# EAGLE board power-shield (EAGLE 7.5.0)
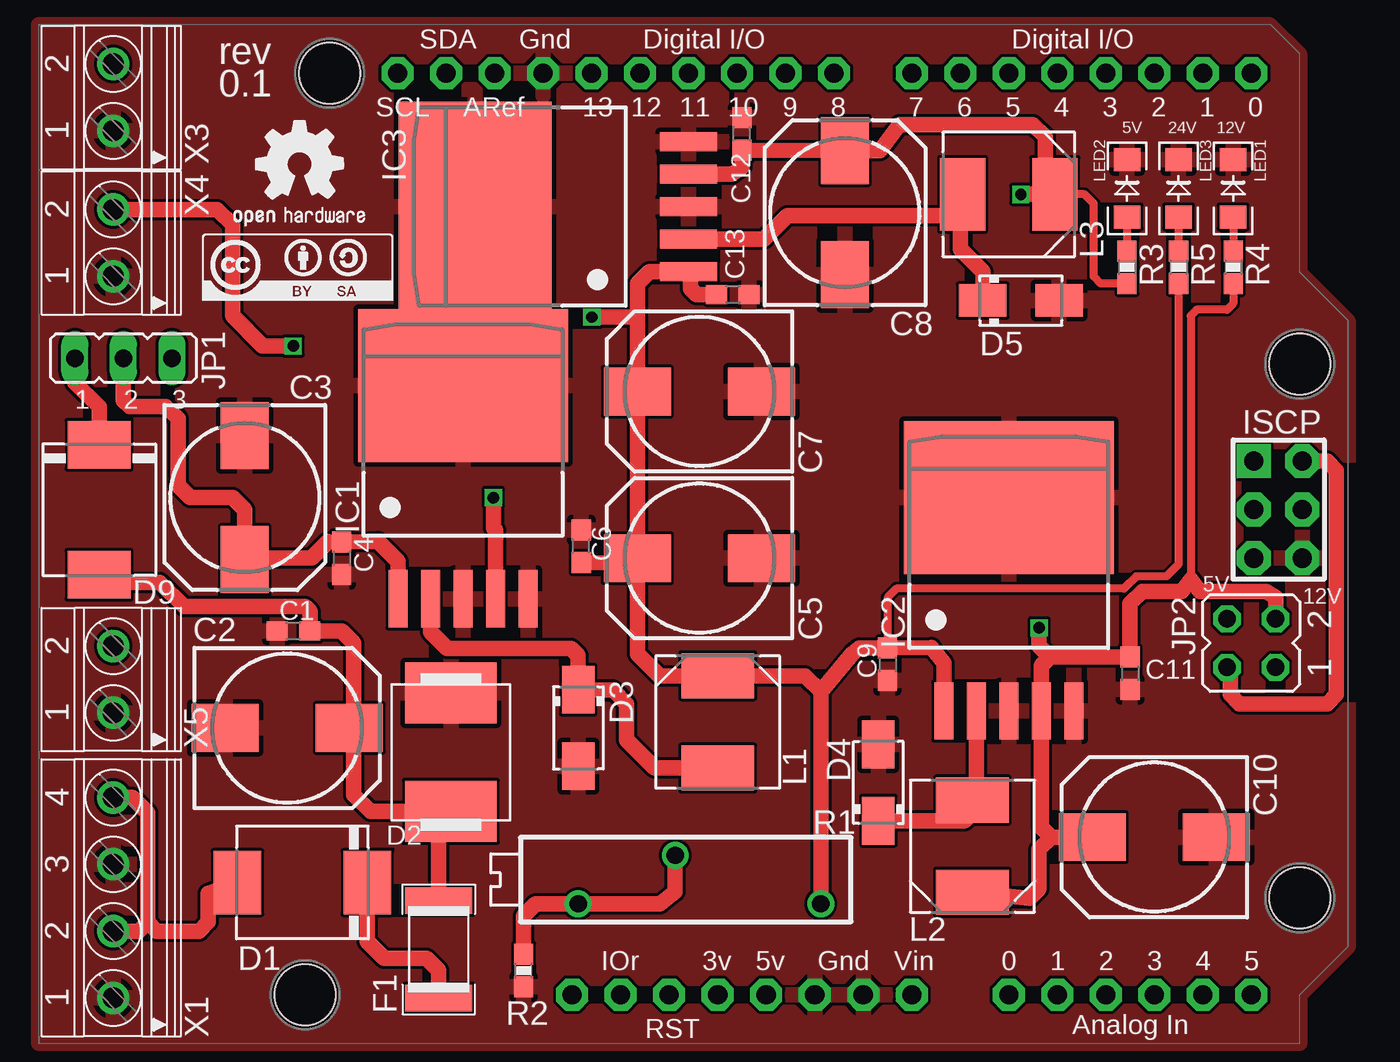
[diagram p0: board, top side]
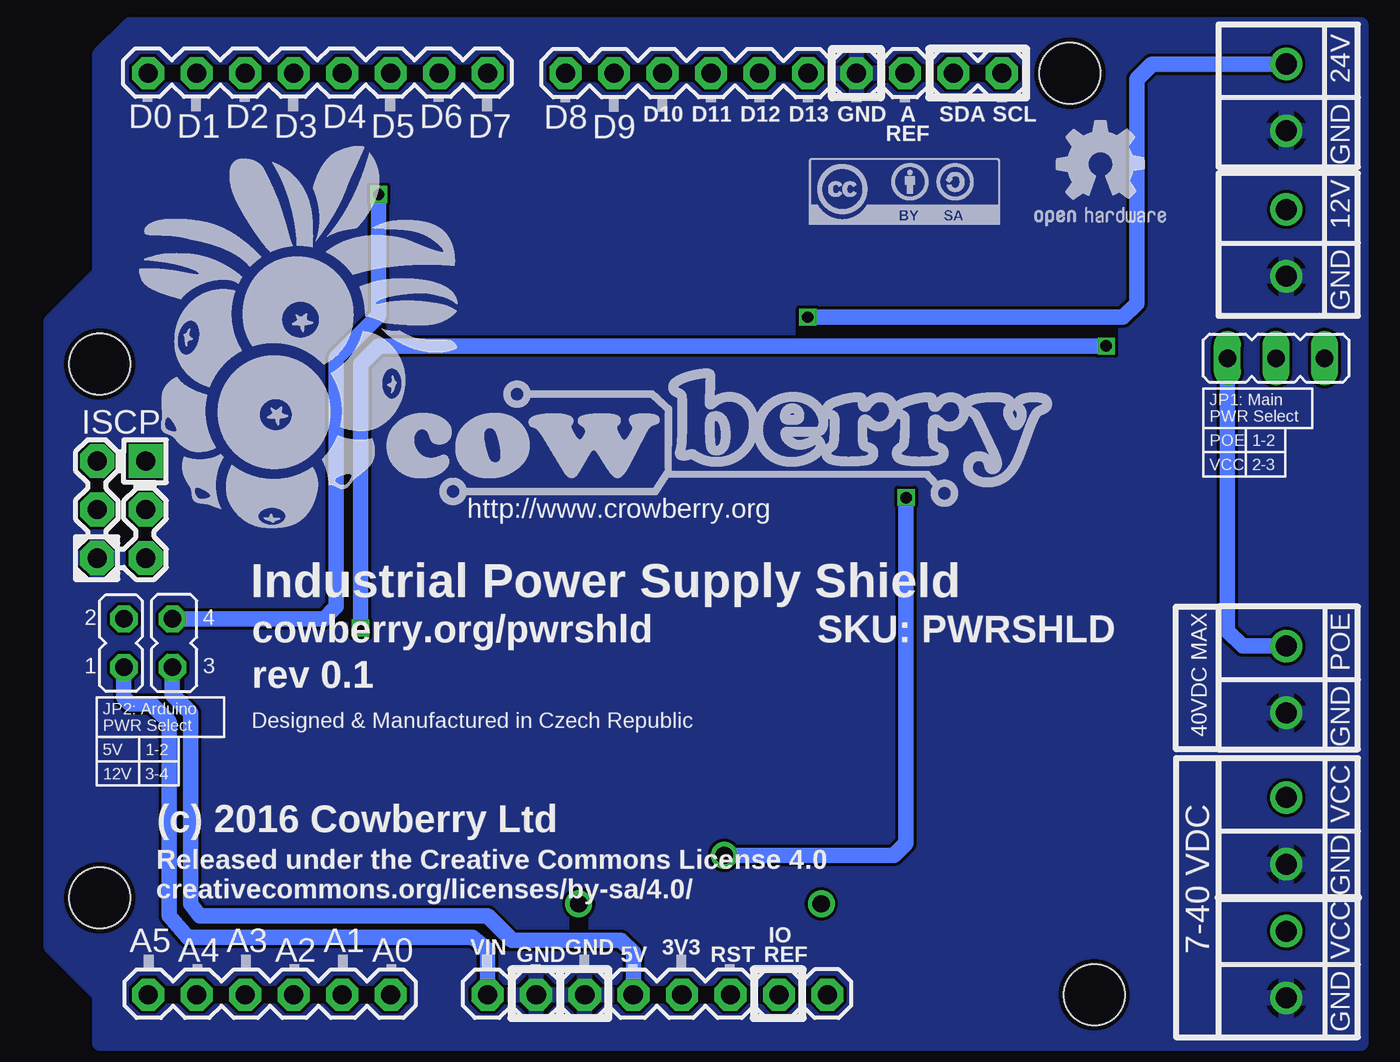
[diagram p1: board, bottom side, seen from below]

No outline drawn. Coordinates in mm, seen from the top.
Copper layers (1*16): Top 0.035mm / dielectric 1.5mm / Bottom 0.035mm
Design rules "Fusion_eagle_rule_v1.1": minimum track width 6mil, minimum drill 12mil, track to track 6mil, track to pad 6mil, pad to pad 6mil, via to via 6mil, smd to smd 0mil, copper to edge 10mil, drill to drill 10mil, minimum pad ring 10mil, minimum via ring 6mil, stop-mask expansion 2mil, vias tented up to drill 100mil, thermal gap 10mil
Holes 3.2 mm at 13.97,2.54 66.04,7.62 66.04,35.56 15.24,50.8

## Footprints (pad centres in the part's own frame; a part is rotated, then mirrored left to right if it is on the bottom)
CAP-0603 = smd 1.1 x 1: 1 -0.85,0; 2 0.85,0
CAP-POL-0810 = smd 3.5 x 2.5: + 3.25,0; - -3.25,0
DO-214AB = smd 2.5 x 3.3: A 3.4,0; C -3.4,0
DO-214AA = smd 3.2 x 4.8: A -3.1,0; C 3.1,0
DO-214AC = smd 2.5 x 1.7: A 2,0; C -2,0
1812 = smd 1.4 x 3.5: 1 -2.55,0; 2 2.55,0
TO263-5 = smd 1 x 3: 1 -3.4,-4.508; 2 -1.7,-4.508; 3 0,-4.508; 4 1.7,-4.508; 5 3.4,-4.508 | smd 11 x 8: TAB 0,6.668
JP2 = drill 0.914 long: 1 -2.54,0; 2 0,0; 3 2.54,0
JP2Q = drill 0.914 octagon: 1 -1.27,-1.27; 2 1.27,-1.27; 3 -1.27,1.27; 4 1.27,1.27
IND_ELL6XH = smd 2.362 x 3.81: 1 -2.413,0; 2 2.413,0
LED-1206 = smd 1.2 x 1.4: A -1.5,0; C 1.5,0
ARDUINOR3_ICSP = drill 1 pad 1.676 octagon: 3V 35.56,2.54; 5V 38.1,2.54; A0 50.8,2.54; A1 53.34,2.54; A2 55.88,2.54; A3 58.42,2.54; A4 60.96,2.54; A5 63.5,2.54; AREF 23.876,50.8; D0 63.5,50.8; D1 60.96,50.8; D2 58.42,50.8; D3 55.88,50.8; D4 53.34,50.8; D5 50.8,50.8; D6 48.26,50.8; D7 45.72,50.8; D8 41.656,50.8; D9 39.116,50.8; D10 36.576,50.8; D11 34.036,50.8; D12 31.496,50.8; D13 28.956,50.8; GND 26.416,50.8; GND@1 43.18,2.54; GND@2 40.64,2.54; IOREF 30.48,2.54; RESERVED 27.94,2.54; RESET 33.02,2.54; SCL 18.796,50.8; SDA 21.336,50.8; VIN 45.72,2.54 | drill 1 pad 1.778 octagon: 5V_ICSP 66.167,30.48; GND@3 66.167,25.4; MOSI 66.167,27.94; RESET_ICSP 63.627,25.4; SCK 63.627,27.94 | drill 1 pad 1.778 square: MISO 63.627,30.48
RTRIM43P = drill 0.9: 1 -7.62,1.27; 2 0,-1.27; 3 5.08,1.27
R-0603 = smd 1.1 x 1: 1 -0.85,0; 2 0.85,0
1751264 = drill 1.1 pad 1.7: 1 -5.25,-0.1; 2 -1.75,-0.1; 3 1.75,-0.1; 4 5.25,-0.1
1751248 = drill 1.1 pad 1.7: 1 -1.75,-0.1; 2 1.75,-0.1

## Placement (x,y rotation side)
C1  0.1uF  [CAP-0603]  13.34,21.59 180 top
C2  220uf/63V  [CAP-POL-0810]  13.02,16.51 0 top
C3  220uF/63V  [CAP-POL-0810]  10.79,28.57 270 top
C4  0.1uF  [CAP-0603]  15.88,25.4 270 top
C5  1mF/35V  [CAP-POL-0810]  34.61,25.4 180 top
C6  0.1uF  [CAP-0603]  28.42,26.04 90 top
C7  470uF/35V  [CAP-POL-0810]  34.61,34.13 180 top
C8  1mF/10V  [CAP-POL-0810]  42.23,43.5 90 top
C9  0.1uF  [CAP-0603]  44.45,19.84 270 top
C10  1mF/25V  [CAP-POL-0810]  58.42,10.79 180 top
C11  0.1uF  [CAP-0603]  57.15,19.37 270 top
C12  0.1uF  [CAP-0603]  36.83,47.62 90 top
C13  0.1uF  [CAP-0603]  36.35,39.21 0 top
D1  ES3J  [DO-214AB]  13.81,8.41 180 top
D2  SMAJ60A  [DO-214AA]  21.59,15.24 270 top
D3  1N5822  [DO-214AC]  28.26,16.51 270 top
D4  1N5822  [DO-214AC]  43.97,13.65 90 top
D5  1N5822  [DO-214AC]  51.44,38.89 0 top
D9  ES3J  [DO-214AB]  3.17,27.94 270 top
F1  RXE014E  [1812]  20.95,4.92 90 top
GOLD_ORB_SM1  OSHW_LOGO_GOLD_ORB_SM  [OSHW_5MM]  9.84,41.75 0 top
GOLD_ORB_SM2  OSHW_LOGO_GOLD_ORB_SM  [OSHW_5MM]  17.46,41.75 0 bottom
IC1  LM2576 ADJ  [TO263-5]  22.23,27.78 0 top
IC2  LM2576 12V  [TO263-5]  50.8,21.91 0 top
IC3  LM2576 5V  [TO263-5]  29.53,43.81 90 top
JP1  POE Select  [JP2]  4.45,35.88 0 top
JP2  PWR Select  [JP2Q]  63.5,20.95 90 top
L1  10UH  [IND_ELL6XH]  35.56,16.83 270 top
L2  10UH  [IND_ELL6XH]  48.9,10.32 90 top
L3  10UH  [IND_ELL6XH]  50.8,44.45 180 top
LED1  GREEN  [LED-1206]  62.55,44.77 90 top
LED2  GREEN  [LED-1206]  56.99,44.77 90 top
LED3  GREEN  [LED-1206]  59.69,44.77 90 top
M1  ARDUINO_R3_ICSP  [ARDUINOR3_ICSP]  0,0 0 top
R1  47K  [RTRIM43P]  33.34,8.57 180 top
R2  1K2  [R-0603]  25.4,3.81 90 top
R3  1K  [R-0603]  56.99,40.64 270 top
R4  330R  [R-0603]  62.55,40.64 270 top
R5  330R  [R-0603]  59.69,40.64 270 top
U$1  COWBERRY_35MM  [COWBERRY_35MM]  51.12,28.1 0 bottom
U$2  COWBERRY_LOGO20MM  [COWBERRY_LOGO_20MM]  63.98,26.99 0 bottom
U$3  CC-BY-SA10MM  [CC-BY-SA_10MM]  28.89,42.86 0 bottom
U$4  CC-BY-SA10MM  [CC-BY-SA_10MM]  8.57,38.89 0 top
X1  PWR  [1751264]  3.81,7.62 90 top
X3  +24V  [1751248]  3.81,49.53 90 top
X4  +12V  [1751248]  3.81,41.91 90 top
X5  POE  [1751248]  3.81,19.05 90 top

## Library data of the parts
C1-C13 D2-D5 F1 IC1-IC3 LED1-LED3 M1 R2-R5 = cowberry
D1 D9 = cowberry; MF: Fairchild; MPN: S3M; OC_FARNELL: 9843884; OC_NEWARK: 58K2398
GOLD_ORB_SM1 GOLD_ORB_SM2 U$2-U$4 = cowberry_logos
JP1 JP2 = jumper
L1-L3 = cowberry; MPN: ELL6SH100M; OC_FARNELL: 1539555; OC_NEWARK: 95M4201; PACKAGE: SMD; SUPPLIER: PANASONIC
R1 = rcl
U$1 = fastybird
X1 = con-phoenix-350; MPN: 1751264; OC_FARNELL: unknown; OC_NEWARK: 10R0934
X3-X5 = con-phoenix-350; OC_FARNELL: unknown; OC_NEWARK: unknown

## Nets
5V: JP2.3 M1.5V M1.5V_ICSP
+12V: C10.+ C11.1 IC2.4 JP2.2 L2.1 R4.2 X4.2
+24V: C5.+ C6.1 C7.+ C9.1 C13.1 IC2.1 IC3.1 L1.1 R1.1 R5.2 X3.2
GND: C1.2 C2.- C3.- C4.2 C5.- C6.2 C7.- C8.- C9.2 C10.- C11.2 C12.2 C13.2 D2.A D3.A D4.A D5.A IC1.3 IC1.5 IC1.TAB IC2.3 IC2.5 IC2.TAB IC3.3 IC3.5 IC3.TAB LED1.C LED2.C LED3.C M1.GND M1.GND@1 M1.GND@2 M1.GND@3 R2.1 X1.1 X1.3 X3.1 X4.1 X5.1
N$1: LED3.A R5.1
N$2: LED2.A R3.1
N$3: D9.C JP1.1
N$4: IC1.4 R1.2 R1.3 R2.2
N$5: D5.C IC3.2 L3.2
N$32: D1.C F1.1
N$33: D4.C IC2.2 L2.2
N$38: LED1.A R4.1
N$39: D3.C IC1.2 L1.2
POE+: JP1.3 X5.2
POWER+: D1.A X1.2 X1.4
POWER_+_PROTECTED1: C1.1 C2.+ D2.C D9.A F1.2
V+: C3.+ C4.1 IC1.1 JP1.2
VCC: C8.+ C12.1 IC3.4 JP2.4 L3.1 R3.2
VIN: JP2.1 M1.VIN

## Tracks (layer width: path | path; a pad name or v marks a point on that pad's centre or on a via)
5V
  Top 0.813: M1.5V_ICSP 67.47,30.48 67.94,30 67.94,18.26 67.47,17.78 62.87,17.78 62.39,18.26 62.39,19.53 JP2.3
  Bottom 0.813: M1.5V 38.1,4.76 38.73,5.4 44.45,5.4 45.72,6.67 60.8,6.67 61.28,7.3 61.28,17.3 62.23,18.26 JP2.3
+12V  (via drill 0.6)
  Top 0.406: 60.33,24.29 60.33,38.1 60.64,38.42 62.23,38.42 62.55,38.73 R4.2
  Top 0.813: 52.95,20.24 C11.1 57.15,23.02 57.78,23.65 59.85,23.65 60.33,24.29 60.8,23.65 64.29,23.65 64.77,23.34 JP2.2 | 52.95,20.24 52.5,19.8 IC2.4 52.5,11.32 53.02,10.79 | X4.2 9.36,43.66 10.16,42.86 10.16,38.1 11.75,36.51 v13.34,36.51 | v52.39,21.75 52.39,20.8 52.95,20.24 | 53.02,10.79 C10.+ | L2.1 51.88,7.59 52.39,8.1 52.39,10.16 53.02,10.79
  Bottom 0.813: v13.34,36.51 51.44,36.51 52.39,35.56 v52.39,21.75
+24V  (via drill 0.6)
  Top 0.406: R5.2 59.69,25.08 59.05,24.45 57.47,24.45 56.83,23.81 44.93,23.81 44.45,23.34 C9.1
  Top 0.813: C5.+ 31.36,20.39 32.51,19.24 L1.1 40.13,19.24 40.96,18.41 | C6.1 31.12,25.16 C5.+ | C5.+ C7.+ 31.36,38.02 | IC2.1 47.4,19.91 46.75,20.72 C9.1 42.97,20.69 42.63,20.4 40.96,18.41 | R1.1 40.96,18.41 | 31.36,38.02 v28.97,38.02 | C13.1 34.45,39.21 34.13,39.53 34.13,40.32 IC3.1 32,40.41 31.36,39.77 31.36,38.02
  Bottom 0.813: v28.97,38.02 12.46,38.02 11.75,38.73 11.75,50.48 10.95,51.28 X3.2
GND
  pour Top: 0,0 66.04,0 66.04,2.54 68.58,5.08 68.58,37.78 66.04,40.32 66.04,51.75 64.45,53.34 0,53.34
  pour Bottom: 0,53.34 64.45,53.34 66.04,51.75 66.04,40.32 68.58,37.78 68.58,5.08 66.04,2.54 66.04,0 0,0
N$1
  Top 0.406: LED3.A R5.1
N$2
  Top 0.406: LED2.A R3.1
N$3
  Top 0.813: JP1.1 1.91,34.61 3.17,33.34 D9.C
N$4  (via drill 0.6)
  Top 0.813: R2.2 25.4,6.67 26.04,7.3 R1.3 32.54,7.3 33.34,7.94 R1.2 | v23.81,28.57 23.81,26.99 23.93,26.88 IC1.4
  Bottom 0.813: R1.2 24.45,9.84 23.81,10.48 v23.81,28.57
N$5
  Top 0.813: L3.2 48.39,43.34 48.26,43.34 | IC3.2 37.99,42.12 39.21,43.34 48.26,43.34 | D5.C 49.44,40.42 48.26,41.59 48.26,43.34
N$32
  Top 0.813: D1.C 17.21,5.33 18.1,4.45 20.32,4.45 20.95,3.81 F1.1
N$33
  Top 0.813: IC2.2 49.1,12.53 L2.2 48.9,12.06 48.48,11.65 D4.C
N$38
  Top 0.406: LED1.A R4.1
N$39
  Top 0.813: IC1.2 20.52,21.54 21.38,20.69 27.89,20.69 28.26,20.32 D3.C 30.07,18.51 30.8,17.78 30.8,15.88 32.26,14.41 L1.2
POE+
  Bottom 0.813: X5.2 6.2,20.8 6.99,21.59 JP1.3
POWER+
  Top 0.813: D1.A 8.89,7.84 8.89,6.35 8.41,5.87 6.2,5.87 5.71,6.35 | X1.4 4.91,12.87 5.71,12.06 5.71,6.35 | X1.2 5.24,5.87 5.71,6.35
POWER_+_PROTECTED1
  Top 0.813: D9.A 3.58,24.13 6.35,24.13 7.62,22.86 13.97,22.86 14.21,22.62 C1.1 15.88,21.59 16.51,20.95 16.51,16.59 C2.+ 16.51,16.43 16.51,13.02 17.39,12.14 D2.C 20.95,12.14 F1.2
V+
  Top 0.813: C3.+ 10.79,27.94 10.16,28.57 7.94,28.57 7.3,29.21 7.3,32.7 6.67,33.34 4.76,33.34 4.45,33.66 JP1.2 | 11.11,25.64 C3.+ | IC1.1 18.82,25.23 17.78,26.27 C4.1 15.16,26.27 14.29,25.4 10.87,25.4 C3.+
VCC  (via drill 0.6)
  Top 0.406: 53.18,44.42 L3.1 54.77,44.45 55.24,43.97 55.24,40.16 55.62,39.79 R3.2
  Top 0.813: v51.44,44.45 52.7,44.45 | 52.7,44.45 L3.1 | IC3.4 36.31,45.52 36.83,45.88 C12.1 C8.+ 44.05,46.75 45.09,48.1 52.07,48.1 52.7,47.47 52.7,44.45
  Bottom 0.813: v51.44,44.45 51.44,38.1 53.66,35.88 53.66,22.86 54.29,22.23 JP2.4
VIN
  Bottom 0.813: M1.VIN 45.72,4.92 46.51,5.56 61.44,5.56 62.39,6.67 62.39,16.83 63.34,17.78 64.45,17.78 64.77,18.1 JP2.1

## Text on the board
tPlace: rev / 0.1 | 5V | 24V | 12V | ISCP | 5V | 12V
bPlace: 24V | GND | SCL | SDA | A | GND | D13 | D12 | D11 | D10 | D8 | D6 | D4 | D2 | D0 | REF | D9 | D7 | D5 | D3 | D1 | 12V | GND | JP1: Main / PWR Select | ISCP | 1-2 | POE | 2-3 | VCC | http://www.crowberry.org | POE | 40VDC MAX | Industrial Power Supply Shield | 4 | 2 | SKU: PWRSHLD | cowberry.org/pwrshld | GND | rev 0.1 | 3 | 1 | Designed & Manufactured in Czech Republic | JP2: Arduino / PWR Select | VCC | 1-2 | 5V | 3-4 | 12V | 7-40 VDC | GND | (c) 2016 Cowberry Ltd | Released under the Creative Commons License 4.0 / creativecommons.org/licenses/by-sa/4.0/ | VCC | IO | 3V3 | GND | VIN | A1 | A3 | A5 | GND | REF | RST | 5V | GND | A0 | A2 | A4